# EAGLE board board (EAGLE 9.7.0)
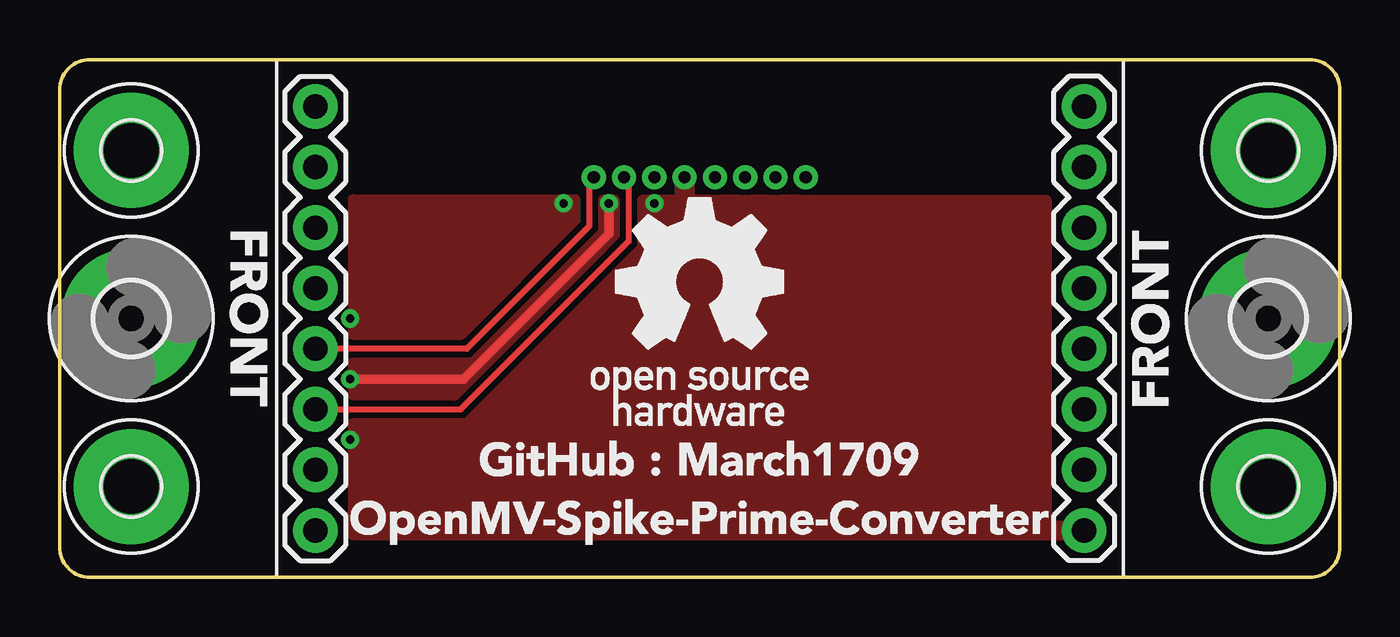
[diagram p0: board, top side]
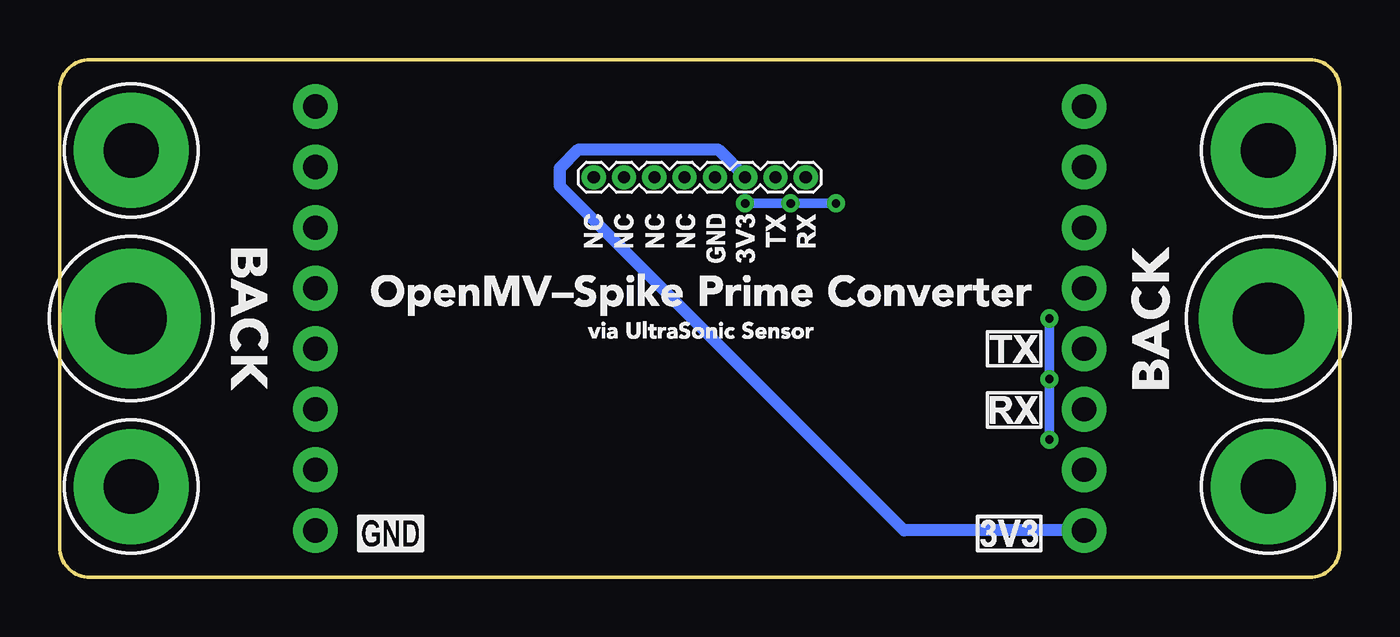
[diagram p1: board, bottom side, seen from below]

Size 53.72 x 21.72 mm. Coordinates in mm from the lower left corner, seen from the top.
Outline: 52.45,21.72 1.27,21.72 arc90 0,20.45 0,1.27 arc90 1.27,0 52.45,0 arc90 53.72,1.27 53.72,20.45 arc90 52.45,21.72
Copper layers (1*16): Top / Bottom
Stack-up Default Layer Stack: Top User Defined 0.035mm / Dielectric-1 User Defined 1.5mm / Bottom User Defined 0.035mm
Design rules "default": minimum track width 6mil, minimum drill 0.35mm, track to track 6mil, track to pad 6mil, pad to pad 6mil, via to via 6mil, smd to smd 6mil, copper to edge 40mil, drill to drill 6mil, minimum pad ring 10mil, minimum via ring 8mil, stop-mask expansion 4mil, vias tented up to drill 0mil, thermal gap 10mil

## Footprints (pad centres in the part's own frame; a part is rotated, then mirrored left to right if it is on the bottom)
3,0-PAD = drill 3 pad 5.842: B3,0 0,0
1X08 = drill 1.016 pad 1.88: 1 0,0; 2 2.54,0; 3 5.08,0; 4 7.62,0; 5 10.16,0; 6 12.7,0; 7 15.24,0; 8 17.78,0
1X08' = drill 0.508 pad 1.016: P$1 0,0; P$2 1.27,0; P$3 2.54,0; P$4 3.81,0; P$5 5.08,0; P$6 6.35,0; P$7 7.62,0; P$8 8.89,0
2,3-PAD = drill 2.3 pad 4.826: P$1 0,0

## Placement (x,y rotation side)
H1  MOUNT-PAD-ROUND3.0  [3,0-PAD]  3,10.86 0 top
H2  MOUNT-PAD-ROUND3.0  [3,0-PAD]  50.72,10.86 0 top
J3  [1X08]  10.73,1.97 90 top
J4  [1X08]  42.99,19.75 270 top
U$1  1X08  [1X08']  31.31,16.79 0 bottom
U$2  MOUNT-PAD-ROUND  [2,3-PAD]  3,3.81 0 top
U$3  MOUNT-PAD-ROUND  [2,3-PAD]  3,17.91 0 top
U$4  MOUNT-PAD-ROUND  [2,3-PAD]  50.72,3.81 0 top
U$5  MOUNT-PAD-ROUND  [2,3-PAD]  50.72,17.91 0 top

## Library data of the parts
H1 H2 = holes
J3 J4 = SparkFun-Connectors; PROD_ID: CONN-08438
U$1 = pinhead_1.27mm
U$2-U$5 = holes_small

## Nets
3V3: J3.1 U$1.P$6
GND: J4.8 U$1.P$5
N$3: J3.4 U$1.P$8
N$4: J3.3 U$1.P$7

## Tracks (layer width: path | path; a pad name or v marks a point on that pad's centre or on a via)
3V3
  Bottom 0.508: J3.1 18.29,1.97 32.73,16.41 32.73,17.16 31.94,17.95 26.1,17.95 24.96,16.81 U$1.P$6
GND  (via drill 0.35)
  Top 0.406: v23.05,15.69 23.05,14.41 16.95,8.32 v12.19,8.32
  Bottom 0.406: v12.19,5.78 v12.19,8.32 v12.19,10.86 | v24.96,15.69 v23.05,15.69 v21.14,15.69
  pour Top (isolate 0.254): 12.1,16.07 12.1,1.56 44.35,1.56 44.35,2.39 41.62,2.39 41.62,16.02
N$3
  Top 0.254: J3.4 17.08,9.59 22.23,14.73 22.23,16.6 U$1.P$8
N$4
  Top 0.254: J3.3 16.83,7.05 23.88,14.1 23.88,16.6 U$1.P$7

## Text on the board
tPlace: /Users/aoiyamanaka/Documents/OpenMV_breakout2023_silk.bmp | /Users/aoiyamanaka/Documents/OpenMV_breakout2023_silk.bmp | /Users/aoiyamanaka/Documents/OpenMV_breakout2023_silk_top.bmp
bPlace: /Users/aoiyamanaka/Documents/OpenMV_breakout2023_silk_bottom.bmp | /Users/aoiyamanaka/Documents/OpenMV_breakout2023_silk_bottom.bmp | /Users/aoiyamanaka/Documents/OpenMV_breakout2023_silk_bottom.bmp | /Users/aoiyamanaka/Documents/OpenMV_breakout2023_silk_bottom.bmp